# Altium PCB 驱动.PcbDoc
Units mil, origin at the board's own origin, x right, y up, seen from the top; angles counter-clockwise.
Board outline 3937.01 x 1968.5 mil, 2 copper layers (Top Layer, Bottom Layer); 38 components, 36 nets, 204 pads, 28 vias.
Unrouted connection lines stored in the file: 56.
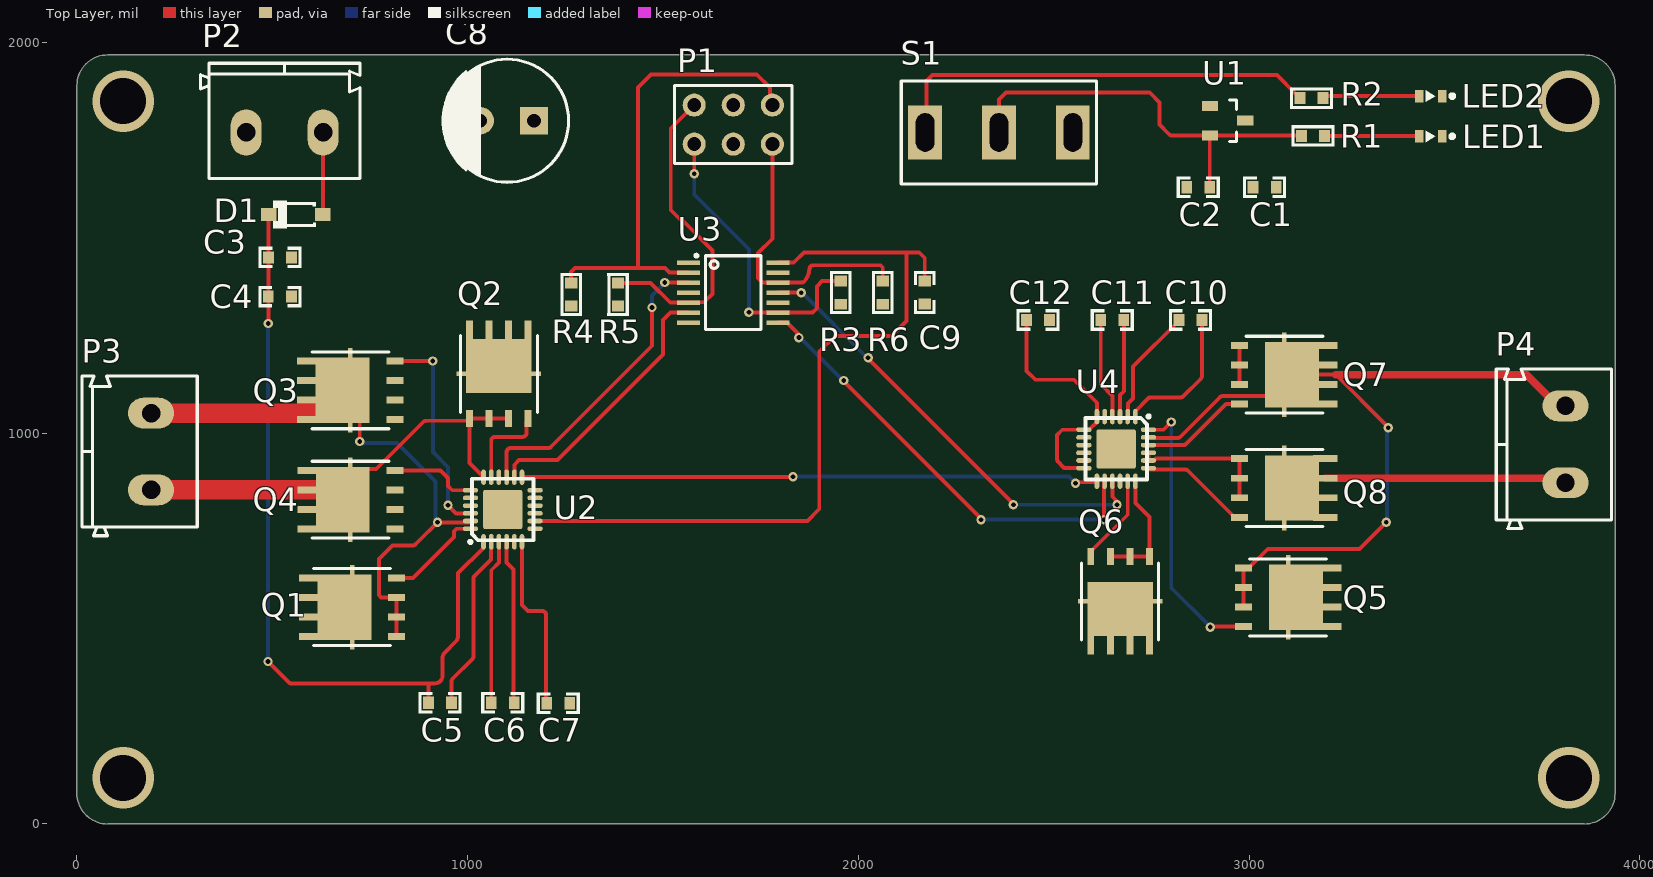
[diagram p0: Top Layer view]
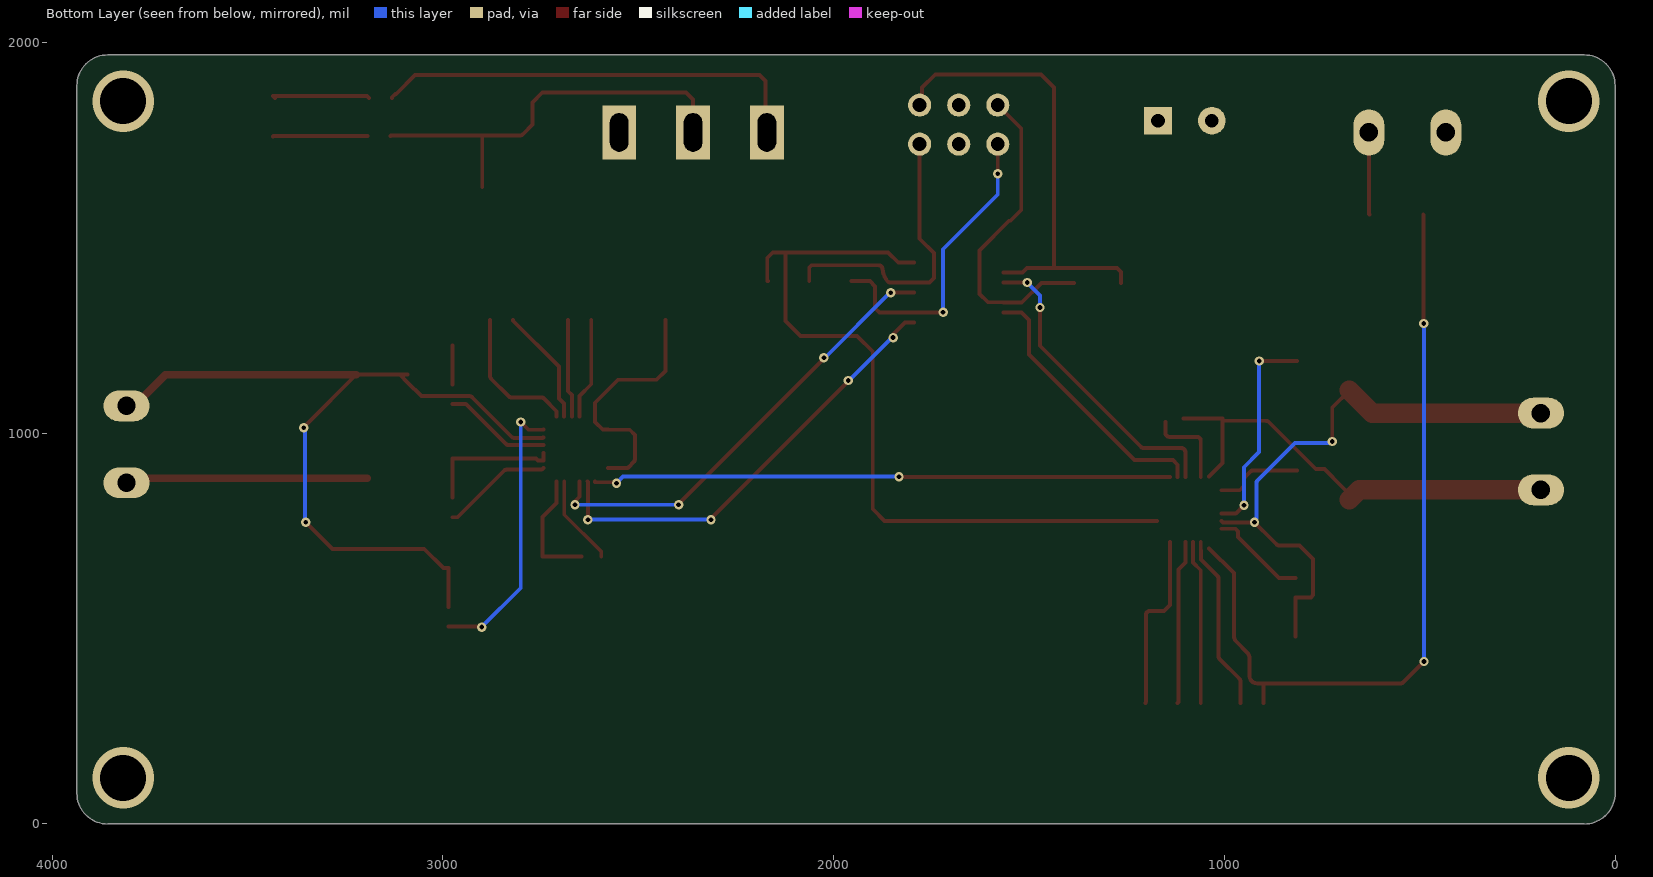
[diagram p1: Bottom Layer view, seen from below]
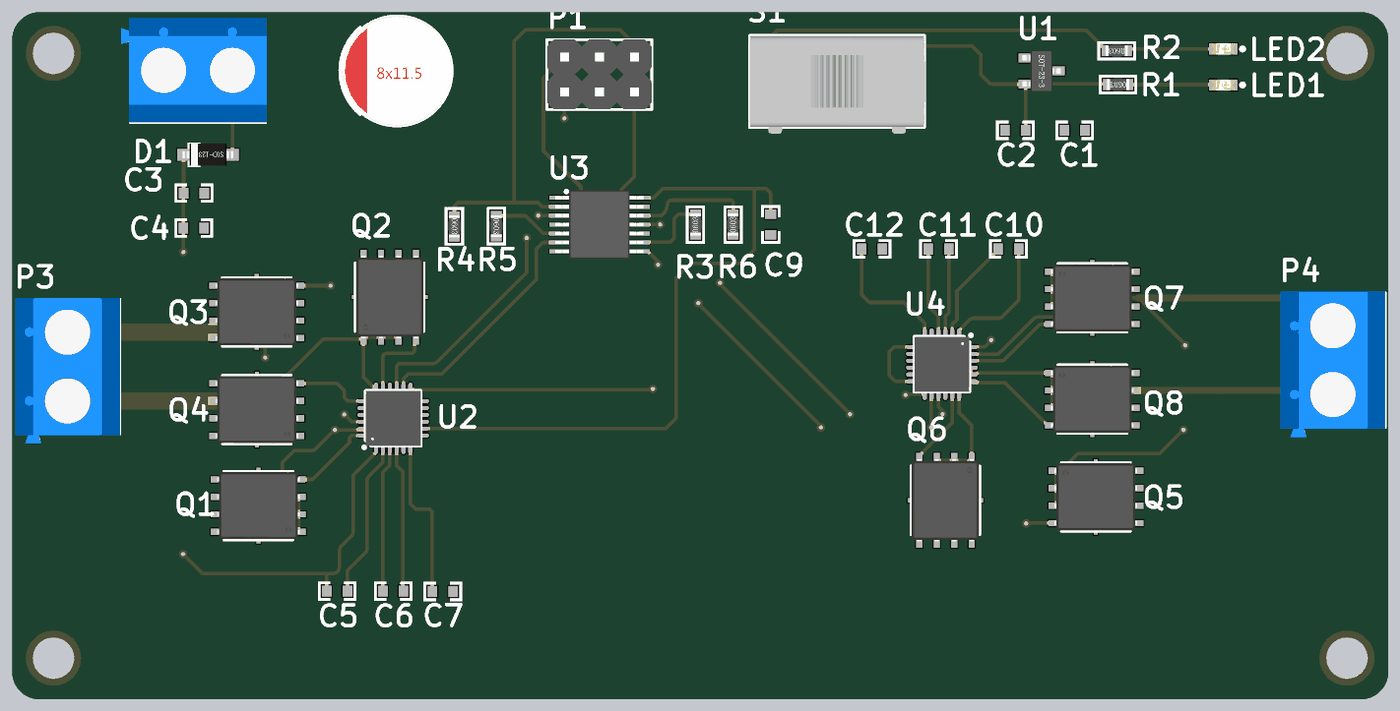
[diagram p2: 3D render of the assembled board from above, using the file's embedded part models]

## Layer stack, top to bottom
Top Solder: solder mask 0.4, Solder Resist, Dk 3.5
Top Layer: signal copper 1.4
Dielectric 1: dielectric 12.6, FR-4, Dk 4.8
Bottom Layer: signal copper 1.4
Bottom Solder: solder mask 0.4, Solder Resist, Dk 3.5

## Board outline
0,78.74 0,1889.76 cw(c78.74,1889.76) 78.74,1968.5 3858.27,1968.5 cw(c3858.27,1889.76) 3937.01,1889.76 3937.01,78.74 cw(c3858.27,78.74) 3858.27,0 78.74,0 cw(c78.74,78.74)

## Design rules (kind name [scope] priority, off if disabled: settings)
Clearance Clearance_1 [All] p1: gap=1 ignorepadtopadclearanceinfootprint=FALSE
PolygonConnect [All] p1: connectstyle=Relief reliefconductorwidth=10 reliefentries=4 polygonreliefangle="90 Angle" airgapwidth=10
RoutingVias [All] p1: holewidth=28 width=50 viastyle="Through Hole" minholewidth=28 minwidth=50 maxholewidth=28 maxwidth=50
SolderMaskExpansion [All] p1: expansion=4 istentingtop=FALSE
Width [All] p1: maxlimit=100 minlimit=10 preferedwidth=10
30 further rules are at their usual default settings.

## Components (designator, comment, footprint, x,y, rotation, side; value= is the part's Value field where it differs from the comment)
C1 "1uF 50V X5R" CAPC1608[0603]S-L 3040,1630 r0 top value=1uF
C2 "1uF 50V X5R" CAPC1608[0603]S-L 2870,1630 r0 top value=1uF
C3 "100nF 50V X7R" CAPC1608[0603]S-L 520,1450 r180 top value=100nF
C4 "100nF 50V X7R" CAPC1608[0603]S-L 519.53,1350 r180 top value=100nF
C5 "1uF 50V X5R" CAPC1608[0603]S-L 929.53,310 r0 top value=1uF
C6 "100nF 50V X7R" CAPC1608[0603]S-L 1090,310 r0 top value=100nF
C7 "1uF 50V X5R" CAPC1608[0603]S-L 1232,309 r180 top value=1uF
C8 "220uF 35V 聚合物固态" "Cap-S-D 3.5-8x11.5" 1101.1,1800 r180 top value=220uF
C9 "1uF 50V X5R" CAPC1608[0603]S-L 2170,1360.47 r90 top value=1uF
C10 "1uF 50V X5R" CAPC1608[0603]S-L 2850,1290 r180 top value=1uF
C11 "100nF 50V X7R" CAPC1608[0603]S-L 2650,1290 r180 top value=100nF
C12 "1uF 50V X5R" CAPC1608[0603]S-L 2460,1290 r180 top value=1uF
D1 "1N5819HW" SOD-123-L 560,1560 r180 top
LED1 "红色贴片LED" LEDC1608(0603)-L 3465,1760 r180 top
LED2 "蓝色贴片LED" LEDC1608(0603)-L 3465,1863 r180 top
P1 "Header-D-M 2x3P" HDR2X3-M 1780,1840 r180 top
P2 "KF/WJ/DG 30x connecter" "KF/WJ/DG 301-2p-5.0mm" 531.57,1770 r0 top
P3 "KF/WJ/DG 30x connecter" "KF/WJ/DG 301-2p-5.0mm" 190,953.36 r90 top
P4 "KF/WJ/DG 30x connecter" "KF/WJ/DG 301-2p-5.0mm" 3810,971.57 r90 top
Q1 "TPH1R403NL" DFN5x6 704.33,555 r90 top
Q2 "TPH1R403NL" DFN5x6 1080,1152.31 r0 top
Q3 "TPH1R403NL" DFN5x6 699.69,1110 r90 top
Q4 "TPH1R403NL" DFN5x6 700,830 r90 top
Q5 "TPH1R403NL" DFN5x6 3100.31,580 r270 top
Q6 "TPH1R403NL" DFN5x6 2670,570 r180 top
Q7 "TPH1R403NL" DFN5x6 3090.31,1150 r270 top
Q8 "TPH1R403NL" DFN5x6 3090.31,860 r270 top
R1 "2.2K ±1%" RESC1608[0603]S-L 3164,1761 r180 top value=2.2K
R2 "2.2K ±1%" RESC1608[0603]S-L 3160,1858 r180 top value=2.2K
R3 "10K ±1%" RESC1608[0603]S-L 1955,1360 r90 top value=10K
R4 "10K ±1%" RESC1608[0603]S-L 1265,1355 r270 top value=10K
R5 "10K ±1%" RESC1608[0603]S-L 1385,1355.47 r270 top value=10K
R6 "10K ±1%" RESC1608[0603]S-L 2062.5,1360 r90 top value=10K
S1 "SW-SPDT" SS12D10 2360,1770 r180 top
U1 "LR8341A-T33" SOT-23 2945,1800 r0 top
U2 "DRV8701E" QFN24-4x4 1090,805 r90 top
U3 "SN74HC125PWR" TSSOP-14 1680,1360 r0 top
U4 "DRV8701E" QFN24-4x4 2660,960 r270 top

## Footprints (in the part's own frame and the unit in brackets; to place one, negate y for a bottom-side part, rotate by r counter-clockwise, add the part's x,y. Pads: shape width x height; smd on the part's side, far side on the other; paste and mask are expansions set on the pad)
"Cap-S-D 3.5-8x11.5" [mm] "固态直插 3.5mm间距 8x11.5mm"
  rect 1.8x1.8 hole 0.9: 1(-1.75,0)
  round 1.8 hole 0.9: 2(1.75,0)
  silkscreen extent -4,-4 4.16,4, body extent -4,-4 4,4, height 11.5
CAPC1608[0603]S-L [mm] "0603贴片电容 有丝印 2脚 1.60x0.80mm IPC高密度"
  rect 0.7x0.8 smd: 1(-0.75,0) 2(0.75,0)
  silkscreen extent -1.4,-0.7 1.4,0.7, body extent -0.8,-0.41 0.8,0.41, height 0.79
DFN5x6 [mm]
  rect 0.45x1.6 smd: 1(-1.905,2.65) 1(-0.635,2.65) 1(0.635,2.65) 1(1.905,2.65)
  rect 5.5x0.3 smd: 1(0,0)
  rect 4.25x3.5 smd: 1(0,0.5)
  rect 0.45x1.1 smd: 2(1.905,-2.9) 3(-1.905,-2.9) 3(-0.635,-2.9) 3(0.635,-2.9)
  silkscreen extent -2.5,-2.5 2.5,2.5, body extent -2.45,-3 2.45,3, height 1
HDR2X3-M [mm] "2x3pin, 2.54mm间距, 直插, 直排针"
  round 1.5 hole 0.9: 1(0,0) 2(0,2.54) 3(2.54,0) 4(2.54,2.54) 5(5.08,0) 6(5.08,2.54)
  silkscreen extent -1.27,-1.27 6.35,3.81, body extent -1.27,-1.27 6.35,3.81, height 8.54
"KF/WJ/DG 301-2p-5.0mm" [mm] "2P 5mm间距 接线端子"
  oval 2x3 hole 1.2: 1(2.5,0) 2(-2.5,0)
  silkscreen extent -5.47,-3 4.9,4.5, body extent -5.6,-3 5,4.6, height 10.1
LEDC1608(0603)-L [mm] "LED,Chip;1.60mm L X 0.80mm W X 0.80mm H"
  rect 0.55x0.8 smd: A(0.75,0) C(-0.75,0)
  silkscreen extent -1.53,-0.38 0.33,0.38, body extent -0.8,-0.4 0.8,0.4, height 0.64
QFN24-4x4 [mm]
  rrect10% 2.55x2.55 smd: 0(0,0)
  oval 1x0.3 smd: 1(-2.1,1.25) 2(-2.1,0.75) 3(-2.1,0.25) 4(-2.1,-0.25) 5(-2.1,-0.75) 6(-2.1,-1.25) 13(2.1,-1.25) 14(2.1,-0.75) 15(2.1,-0.25) 16(2.1,0.25) 17(2.1,0.75) 18(2.1,1.25)
  oval 0.3x1 smd: 7(-1.25,-2.1) 8(-0.75,-2.1) 9(-0.25,-2.1) 10(0.25,-2.1) 11(0.75,-2.1) 12(1.25,-2.1) 19(1.25,2.1) 20(0.75,2.1) 21(0.25,2.1) 22(-0.25,2.1) 23(-0.75,2.1) 24(-1.25,2.1)
  silkscreen extent -2.21,-2 2,2.21, body extent -2,-2 2,2, height 0.9
RESC1608[0603]S-L [mm] "0603贴片电阻 有丝印 2脚 1.60x0.80mm IPC高密度"
  rect 0.7x0.8 smd: 1(-0.75,0) 2(0.75,0)
  silkscreen extent -1.4,-0.7 1.4,0.7, body extent -0.8,-0.4 0.8,0.4, height 0.45
SOD-123-L [mm] "SOD Diode;2.70mm W X 1.60mm L X 1.35mm H body"
  rect 1x0.85 smd: A(-1.75,0) K(1.75,0)
  silkscreen extent -1.32,-0.9 1.48,0.9, body extent -1.85,-0.8 1.85,0.8, height 1.2
SOT-23 [mm] "SOT23, 3-Leads, Body 2.90x2.40mm, Pitch 0.95mm, IPC Medium Density"
  rect 1.05x0.65 smd: 1(-1.15,0.95) 2(-1.15,-0.95) 3(1.15,0)
  silkscreen extent 0.13,-1.35 0.58,1.35, body extent -1.4,-1.45 1.4,1.45, height 1.2
SS12D10 [mm] "拨动开关，直脚，脚距4.8"
  rect 2.2x3.5 hole 1.2 slot 2.5 at 90 deg mask+0.07: 1(-4.8,0) 2(0,0) 3(4.8,0)
  silkscreen extent -6.35,-3.35 6.35,3.35, body extent -6.4,-3.3 6.35,3.8, height 12.5
TSSOP-14 [mm] "TSSOP 14pin 0.65mm间距"
  rect 1.5x0.3 smd mask+0.07: 1(-2.9,1.95) 2(-2.9,1.3) 3(-2.9,0.65) 4(-2.9,0) 5(-2.9,-0.65) 6(-2.9,-1.3) 7(-2.9,-1.95) 8(2.9,-1.95) 9(2.9,-1.3) 10(2.9,-0.65) 11(2.9,0) 12(2.9,0.65) 13(2.9,1.3) 14(2.9,1.95)
  silkscreen extent -2.49,-2.4 1.8,2.49, body extent -3.2,-2.5 3.2,2.5, height 1.13

## Part data
C1 C2 C5 C7 C9 C10 C12: library part "1uF 0603 50V X5R", "贴片瓷片电容; MLCC; 0603(1608);", Voltage=50V, Revision=V1.0, Type=X5R
C3 C4 C6 C11: library part "100nF 0603 50V X7R", "贴片瓷片电容; MLCC; 0603(1608);", Voltage=50V, Revision=V1.0, Type=X7R
C8: library part "S-D 220uF 35V 8x12", "直插固态电容 220uF 35V 8x12", Voltage=35V, Revision=V1.0, Type=聚合物固态
D1: "1N5819HW 肖特基二极管", Revision=V1.0
LED1: library part "LED Chip Red", Price(RMB)=0.00, Published=8-Jun-2000, Publisher="Altium Limited", Revision="July-2002: Re-released for DXP Platform."
LED2: library part "LED Chip Blue", Color=Blue, Price(RMB)=0.00, Published=8-Jun-2000, Publisher="Altium Limited", Revision="July-2002: Re-released for DXP Platform."
P1: "2x3pin, 直插, 双排针", Revision=V1.0
P2 P3 P4: library part "KF/WJ/DG 30x", "接线端子 2Pin"
Q1 Q2 Q3 Q4 Q5 Q6 Q7 Q8: "东芝 N沟 MOS"
R1 R2 R3 R4 R5 R6: library part Res-Chip_1, "贴片电阻", Tolerance=±1%, Revision=V1.0
S1: "单刀双掷开关 3脚船型、钮子、拨动开关 SPDT Subminiature Toggle Switch", Price(RMB)=0.000, Published=24-Mar-1999, Publisher="Altium Limited"
U1: "LDO Vin:40V  Vout:3.3V 100mA ±1% 55dB", Revision=V1.0
U2 U4: "DRV8701E Ti全桥驱动芯片"
U3: "三态输出的四路缓冲器 TSSOP-20"

## Via types
v1: diameter 24, hole 12, Top Layer to Bottom Layer, 24 vias
v2: diameter 157.48, hole 118.11, Top Layer to Bottom Layer, 4 vias

## Nets (pads, with @x,y where several pads share a name; then routed paths per layer and width w, separated by ;. In a path a pad name is that pad's centre, name@x,y a point inside that pad or via, vN(x,y) a via of type N, cw(c..) or ccw(c..) an arc to the next point about the centre after c; other vN are vias at no path point)
DVDD: C9.2 U2.8 U3.14 | length 2029.4
  Top Layer w10: U2.8 1869.47,775.47 1900,806 1900,1209 1940,1249 2085,1249 2123,1287 2123,1459 2119,1463 ; U3.14 1834.77,1436.77 1861,1463 2119,1463 ; C9.2@2168.03,1390 C9.2 2170,1449 2156,1463 2119,1463
EN_1: U2.14 U3.6 | length 690.9
  Top Layer w10: U2.14 1119.53,919.53 1132,932 1230,932 1500,1202 1500,1290 1518.82,1308.82 U3.6
EN_1_IN: P1.5 R5.1 U3.5 | length 826.8
  Top Layer w10: R5.1 1468,1385 1518.59,1334.41 U3.5 1566.73,1335.31 1605.31,1335.31 1627,1357 1627,1468 1551,1544 1547,1544 1520,1571 1520,1780 P1.5
EN_2: U3.8 U4.14 | length 1150.2
  Top Layer w10: U3.8 1817.8,1283.23 1848,1253.02 v1(1848,1245) ; v1(1963,1135) 1963,1132.5 2314,781.5 v1(2314,779) ; v1(2629,779) 2629,875.85 U4.14
  Bottom Layer w10: v1(1848,1245) 1850.5,1245 1960.5,1135 v1(1963,1135) ; v1(2314,779) v1(2629,779)
EN_2_IN: P1.6 R3.2 U3.9 | length 789.7
  Top Layer w10: v1(1580,1664) P1.6 ; v1(1720,1310) 1720.59,1309.41 1793.58,1309.41 U3.9 1794.35,1309 1883,1309 1894,1320 1894,1376 1907.53,1389.53 R3.2
  Bottom Layer w10: v1(1580,1664) 1580,1611 1720,1471 v1(1720,1310)
GND: C1.1 C2.1 C3.1 C4.1 C7.1 C8.2 C9.1 C12.1 LED1.C LED2.C P1.3 P1.4 P2.2 Q3.3 Q4.3 Q7.3 Q8.3 R3.1 R4.2 R5.2 R6.1 U1.1 U2.0 U2.5 U2.16 U2.20 U2.21 U3.1 U3.7 U3.10 U3.13 U4.0 U4.5 U4.16 U4.20 U4.21 | length 455
  Top Layer w10: U4.21 U4.20 2756.95,930.47 2761.47,935 2976.14,935 2976.14,885 Q8.3@2976.14,835 ; Q7.3@2976.14,1125 2976.14,1175 Q7.3@2976.14,1225
motor1_A: P3.1 Q1.3 Q3.1 U2.23 | length 1526.9
  Top Layer w10: Q3.1@680,1110 724,1066 v1(724,979) ; Q1.3@818.5,480 818.5,530 818.5,580 778.86,580 773,585.86 773,678 808,713 859.86,713 ccw(c859.86,723) 866.95,715.95 901.95,750.95 ; 901.98,750.98 902.03,751.03 v1(923,772) 1003.85,772 U2.23
  Top Layer w50: P3.1 621.78,1051.78 Q3.1@680,1110
  Bottom Layer w10: v1(724,979) 728,975 819,975 915.07,878.93 cw(c908,871.86) 918,871.86 918,785 ccw(c928,785) 928,775 925,772 v1(923,772)
motor1_B: P3.2 Q2.3 Q4.1 U2.18 | length 1174.6
  Top Layer w10: Q4.1@680.31,830 680.31,844.76 700,864.45 744.21,908.66 766.11,908.66 886.52,1029.07 cw(c893.59,1022) 893.59,1032 1005,1032 1005,923.46 U2.18@1039.57,888.9 ; Q2.3@1005,1038.14 1055,1038.14 Q2.3@1105,1038.14
  Top Layer w50: P3.2 595.67,854.93 655.38,854.93 Q4.1@680.31,830
motor2_A: P4.1 Q5.3 Q7.1 U4.23 | length 2126.5
  Top Layer w10: U4.23 ccw(c2747.99,998) 2747.99,988 2816.86,988 ccw(c2816.86,998) 2823.93,990.93 2925.05,1092.05 cw(c2932.14,1085) 2932.1,1095 ; 2932.14,1095 3055,1095 3090.31,1130.31 Q7.1@3110,1150 ; Q5.3@2986.14,555 2986.14,605 2986.14,655 2998.94,655 3047.94,704 3283,704 v1(3351,772) ; Q7.1@3090.31,1150 Q7.1@3110,1150 ; v1@3351,1021 3222,1150 Q7.1@3110,1150 ; P4.1@3790.31,1070 P4.1
  Top Layer w20: 3222,1150 3710.31,1150 P4.1@3790.31,1070
  Bottom Layer w10: v1(3351,772) 3353.5,774.5 3353.5,1011.5 v1(3356,1014)
motor2_B: P4.2 Q6.3 Q8.1 U4.18 | length 927.4
  Top Layer w10: Q6.3@2645,684.17 2695,684.17 2745,684.17 2745,786 2709.21,821.79 U4.18
  Top Layer w20: Q8.1@3194.65,885 3789.87,885 cw(c3789.87,865) 3804.01,879.14 P4.2
NetC2_2: C2.2 R1.2 S1.2 U1.2 | length 1077.4
  Top Layer w10: S1.2 2360,1854 2378,1872 2746,1872 2771,1847 2771,1790 2795.67,1765.33 ccw(c2802.74,1772.4) 2802.74,1762.4 2897.75,1762.4 ccw(c2897.75,1772.4) 2899.16,1762.5 U1.2 3132.87,1762.6 R1.2 ; C2.2 U1.2@2899.53,1762.4
NetC3_2: C3.2 C4.2 C5.1 C10.1 D1.K U2.1 U4.1 | length 2408.3
  Top Layer w10: v1(489,416) 489.98,415.02 542.07,362.93 ccw(c549.14,370) 549.14,360 900,360 ; v1(490,1281) C4.2 490.24,1350.24 490.24,1449.76 C3.2 490.47,1559.37 D1.K ; C5.1 900,360 ; U2.1@1038.92,705.39 975.43,641.9 975.43,480.71 cw(c955.43,480.71) 969.56,466.56 941.86,438.86 ccw(c956,424.72) 936,424.72 936,380 cw(c916,380) 916,360 900,360 ; U4.1 2709.21,1056.46 2741.83,1089.07 cw(c2748.9,1082) 2748.9,1092 2824.86,1092 ccw(c2824.86,1102) 2831.95,1094.95 2876.6,1139.6 ccw(c2869.53,1146.67) 2879.53,1146.67 C10.1
  Bottom Layer w10: v1(489,416) 489,1280 v1(490,1281)
NetC5_2: C5.2 U2.2 | length 453
  Top Layer w10: C5.2 959.06,364.91 cw(c969.06,364.91) 961.98,371.98 1012.07,422.07 ccw(c1005,429.14) 1015,429.19 1015,628.13 cw(c1025,628.13) 1017.93,635.2 1060,677.27 1060,700.28 1060.47,700.76 U2.2
NetC6_1: C6.1 U2.3 | length 420.5
  Top Layer w10: C6.1 1060.47,649.46 1080,668.99 1080,722.17 U2.3
NetC6_2: C6.2 U2.4 | length 420.5
  Top Layer w10: U2.4 1099.84,669.16 1118,651 1118,311.53 C6.2
NetC7_2: C7.2 U2.6 U2.7 U2.12 | length 461.8
  Top Layer w10: U2.6 1139.21,560.79 1155,545 1191,545 cw(c1191,535) 1201,534.96 1201,405.14 1201,314.22 ccw(c1211,314.22) C7.2
NetC10_2: C10.2 U4.2 | length 301.6
  Top Layer w10: U4.2 2689.87,1043.02 2689.87,1075.87 2703,1089 2703,1170.56 2820.47,1288.03 C10.2
NetC11_1: C11.1 U4.3 | length 251.3
  Top Layer w10: U4.3 2670,1042.83 2670,1098 2679.53,1107.53 C11.1
NetC11_2: C11.2 U4.4 | length 259.6
  Top Layer w10: C11.2 2620.47,1125.53 2650.16,1095.84 U4.4
NetC12_2: C12.2 U4.6 U4.7 U4.12 | length 651.2
  Top Layer w10: C12.2 2430.47,1159.53 2453,1137 2552,1137 2610.79,1078.21 U4.6 2610.79,1028.9 2591.1,1009.21 U4.7 2577.11,1009 2522,1009 2509,996 2509,933.14 ccw(c2519,933.14) 2511.91,926.09 2524.28,913.72 ccw(c2531.35,920.79) 2531.35,910.79 U4.12
NetLED1_A: LED1.A R1.1 | length 242.4
  Top Layer w10: R1.1 3434.48,1761 LED1.A
NetLED2_A: LED2.A R2.1 | length 255.1
  Top Layer w10: R2.1 3194.53,1863 LED2.A LED2.A@3430.47,1858
NetQ1_2: Q1.2 U2.24 | length 249.2
  Top Layer w10: Q1.2 860,630 965,735 965,749.14 971.65,755.79 U2.24
NetQ2_2: Q2.2 U2.17 | length 223.4
  Top Layer w10: U2.17 1060.47,981 cw(c1070.47,981) 1070.52,991 1141.14,991 ccw(c1141.14,1001) 1151.14,1001 Q2.2@1151.14,1029
NetQ3_2: Q3.2 U2.22 | length 548.3
  Top Layer w10: Q3.2 v1(911,1185) ; v1(950,816) 970.84,795.16 U2.22
  Bottom Layer w10: v1(911,1185) 911,952 950,913 v1(950,816)
NetQ4_2: Q4.2 U2.19 | length 225
  Top Layer w10: Q4.2 925.86,905 cw(c925.86,895) 932.95,902.05 947.09,887.91 cw(c940,880.86) 950,880.9 ; 950,880.86 950,865 960.79,854.21 U2.19
NetQ5_2: Q5.2 U4.24 | length 718.7
  Top Layer w10: U4.24 2742.89,1009 2781,1009 v1(2801,1029) ; v1(2901,504) 2902,505 Q5.2
  Bottom Layer w10: v1(2801,1029) 2801,604 v1(2901,504)
NetQ6_2: Q6.2 U4.17 | length 232.3
  Top Layer w10: Q6.2 2595,696.97 2689.53,791.5 U4.17
NetQ7_2: Q7.2 U4.22 | length 276.2
  Top Layer w10: U4.22 2831.7,969.84 ccw(c2831.7,979.84) 2838.79,972.79 2938.05,1072.05 cw(c2945.14,1065) 2945.1,1075 ; 2945.14,1075 Q7.2
NetQ8_2: Q8.2 U4.19 | length 284.7
  Top Layer w10: U4.19 2743.64,909.82 ccw(c2750.71,916.89) 2750.71,906.89 2837.31,906.89 cw(c2837.31,896.89) 2844.38,903.96 2963.35,785 Q8.2
nSLEEP: R2.2 S1.3 U2.13 U4.13 | length 2603.4
  Top Layer w10: U2.13 1831.68,887.68 v1(1833,889) ; S1.3 2175,1773.98 2175,1902 2190,1917 3071.47,1917 3119.72,1868.74 3121.69,1868.74 3130.47,1859.97 R2.2 ; v1(2556,872) 2558.66,874.66 2609.95,874.66 2610.79,875.5 U4.13
  Bottom Layer w10: v1(1833,889) 2539,889 v1(2556,872)
PH_1: U2.15 U3.3 | length 786.9
  Top Layer w10: U2.15 1099.84,952 cw(c1109.84,952) 1109.89,962 1205.86,962 ccw(c1205.86,972) 1212.93,964.93 1472,1224 v1(1472,1322) ; v1(1505,1386) 1505.2,1385.8 1565.62,1385.8 U3.3
  Bottom Layer w10: v1(1472,1322) 1472,1353 v1(1505,1386)
PH_1_IN: P1.1 R4.1 U3.2 | length 1212.6
  Top Layer w10: R4.1 1265,1413 1275,1423 1436,1423 ; U3.2 1516.82,1411.18 1505,1423 1436,1423 ; P1.1 1773.47,1846.53 1773.47,1884.53 1740,1918 1469,1918 1436,1885 1436,1423
PH_2: U3.11 U4.15 | length 1160.3
  Top Layer w10: U3.11 v1(1854,1360) ; v1(2025,1193) 2025,1191 2397,819 v1(2397,817) ; U4.15 2650.16,837.63 2662,825.79 v1(2662,817)
  Bottom Layer w10: v1(1854,1360) 1856,1360 2023,1193 v1(2025,1193) ; v1(2397,817) v1(2662,817)
PH_2_IN: P1.2 R6.2 U3.12 | length 747.3
  Top Layer w10: P1.2 1780,1498 1743,1461 1743,1397 1754.41,1385.59 U3.12 1854.46,1385.59 ccw(c1854.42,1395.59) 1862.03,1389.11 ccw(c1819.27,1425.28) 1875.11,1420.8 cw(c1885.07,1420) 1885.07,1430 2056.64,1430 2062.5,1424.14 R6.2
VIN: C1.2 C8.1 D1.A P2.1 Q1.1 Q2.1 Q5.1 Q6.1 U1.3 | length 210.5
  Top Layer w10: D1.A 630,1561.1 P2.1
pads on no net: S1.1 U2.9 U2.10 U2.11 U3.4 U4.8 U4.9 U4.10 U4.11
copper on no net:
  other v2: 118.11,118.11 3818.9,118.11 118.11,1850.39 3818.9,1850.39

## Silkscreen, mask and mechanical layers (free items; w line width, h text height)
Mechanical 1:
  the board outline again, w25